# Altium PCB electronic tape measure.PcbDoc
Units mm, origin at the board's own origin, x right, y up, seen from the top; angles counter-clockwise.
Board outline 48 x 75 mm, 2 copper layers (Top Layer, Bottom Layer); 46 components, 43 nets, 170 pads, 128 vias.
Unrouted connection lines stored in the file: 143.
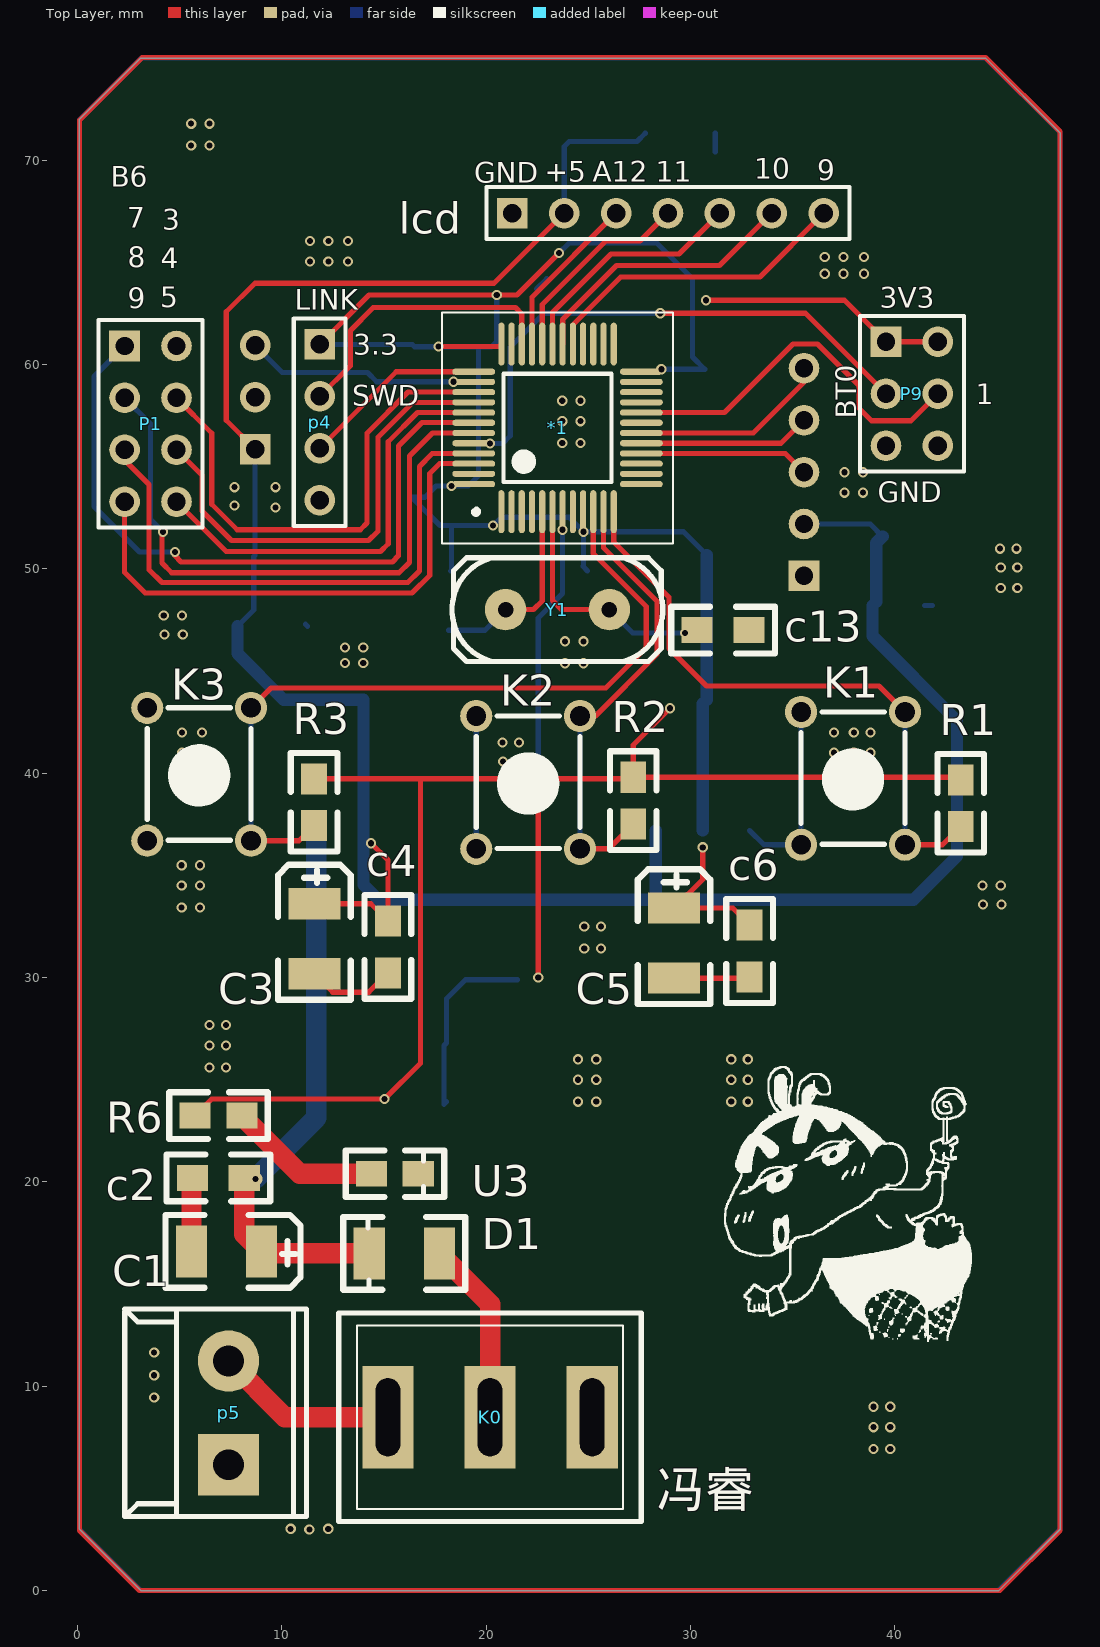
[diagram p0: Top Layer view]
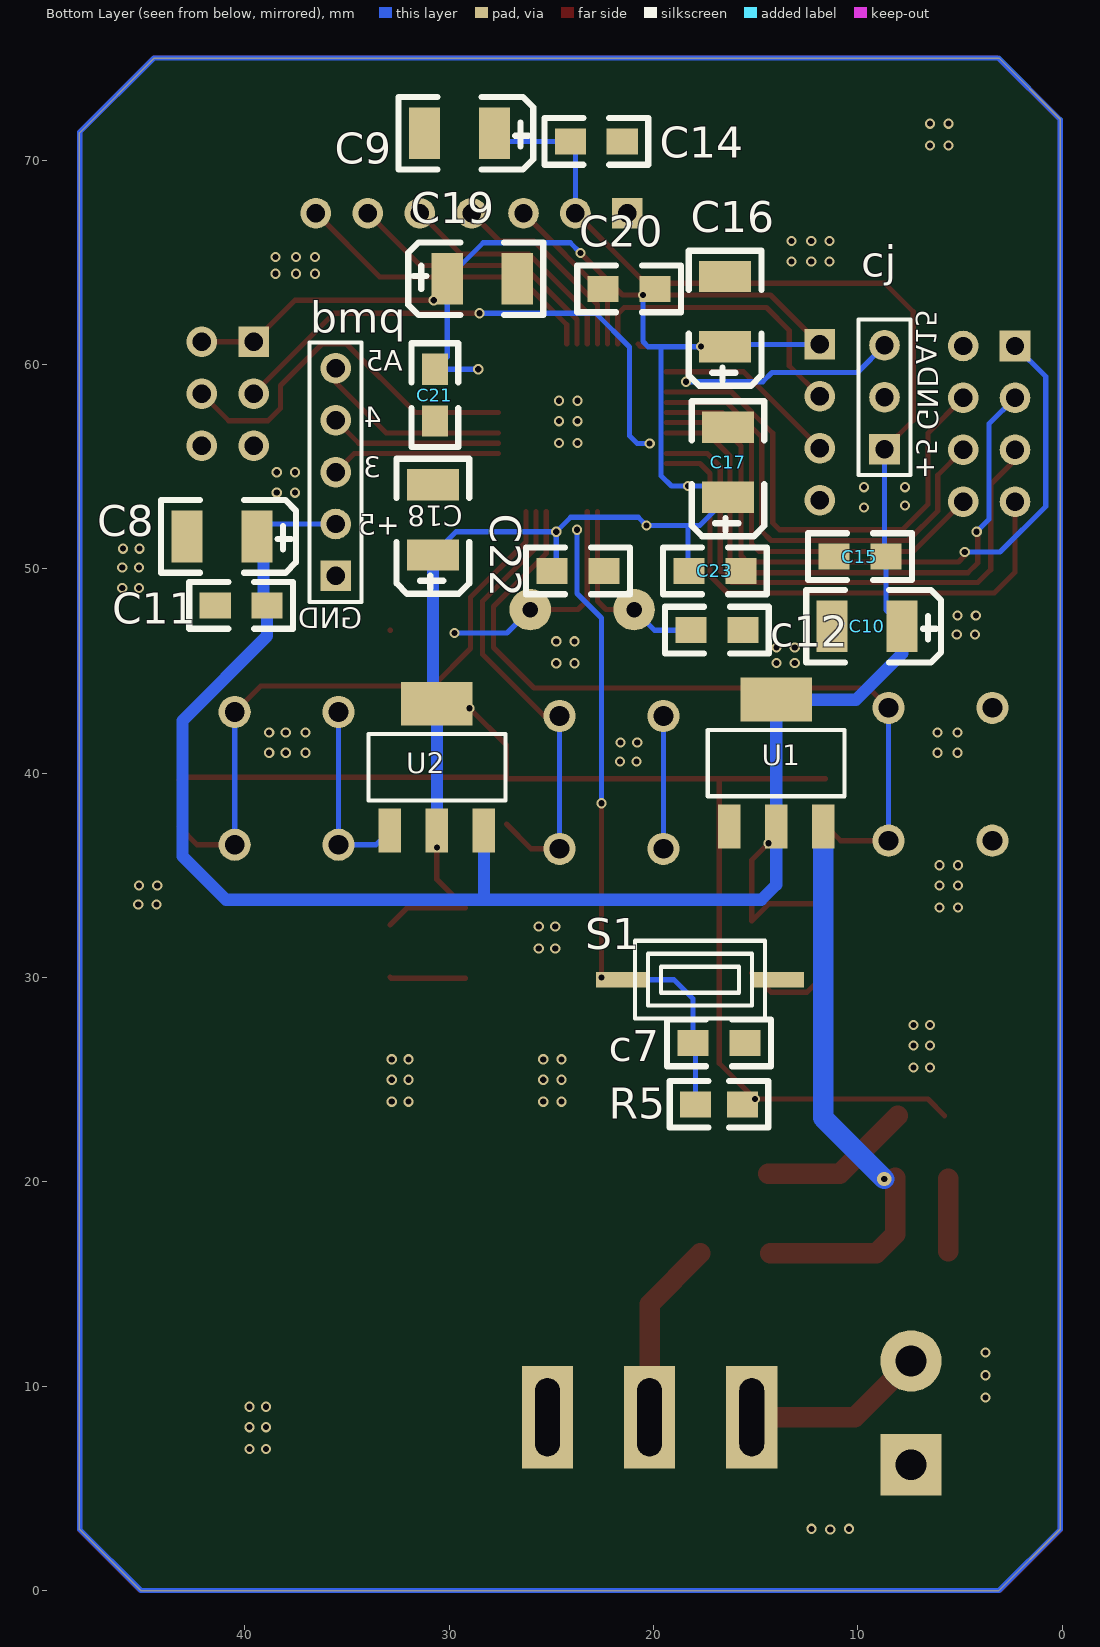
[diagram p1: Bottom Layer view, seen from below]
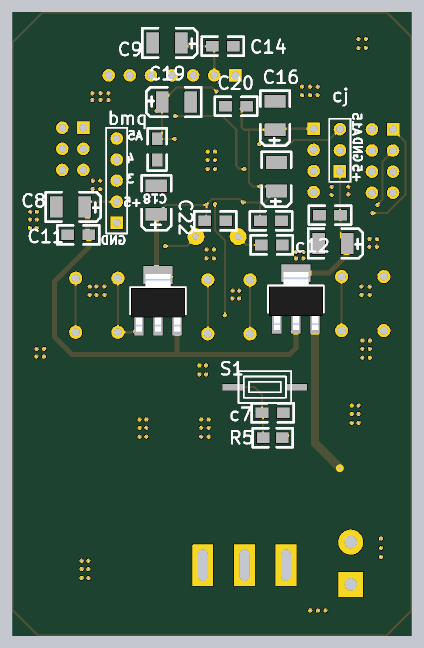
[diagram p2: 3D render of the assembled board from below, using the file's embedded part models]

## Layer stack, top to bottom
Top Solder: solder mask 0.0102, Solder Resist, Dk 3.5
Top Layer: signal copper 0.0356
Dielectric 1: dielectric 0.32, FR-4, Dk 4.8
Bottom Layer: signal copper 0.0356
Bottom Solder: solder mask 0.0102, Solder Resist, Dk 3.5

## Board outline
0.1,3 0.1,72 3.1,75 44.437,75 48.1,71.337 48.1,3 45.1,0 3.1,0

## Design rules (kind name [scope] priority, off if disabled: settings)
Clearance Clearance_1 [InPolygon] p1: gap=0.254 ignorepadtopadclearanceinfootprint=TRUE
Clearance [All] p2: gap=0 ignorepadtopadclearanceinfootprint=TRUE
PolygonConnect [All] p1: connectstyle=Relief reliefconductorwidth=0.254 reliefentries=4 polygonreliefangle="90 Angle" airgapwidth=0.254
RoutingCorners [All] p1: cornerstyle=45-Degree minsetback=0 maxsetback=2.54
RoutingVias [All] p1: holewidth=0.711 width=1.27 viastyle="Through Hole" minholewidth=0 minwidth=0.3 maxholewidth=2 maxwidth=1.27
SolderMaskExpansion [All] p1: expansion=0.102
Width [All] p1: maxlimit=5 minlimit=0.254 preferedwidth=0.254
29 further rules are at their usual default settings.

## Components (designator, comment, footprint, x,y, rotation, side; value= is the part's Value field where it differs from the comment)
*1 "STM32F103C8T6" STM32F103C8T6 23.5,56.9 r90 top
bmq "bianmaqi" HDR1X5 35.56,49.657 r90 bottom
C1 "10uf" 钽电容 7.3,16.6 r180 top
c2 "0.1uf" 0805电容 6.9,20.2 r0 top
C3 "10uf" 钽电容 11.6,31.9 r270 top
c4 "0.1uf" 0805电容 15.2,31.5 r90 top
C5 "10uf" 钽电容 29.2,31.685 r270 top
c6 "0.1uf" 0805电容 32.9,31.3 r90 top
c7 "0.1uf" 0805电容 16.8,26.8 r0 bottom
C8 "10uf" 钽电容 41.123,51.587 r0 bottom
C9 "10uf" 钽电容 29.504,71.319 r0 bottom
C10 "10uf" 钽电容 9.55,47.193 r0 bottom
C11 "100uf" 0805电容 40.183,48.209 r0 bottom
c12 "" 0805电容 16.9,47 r0 bottom value=18pF
c13 "" 0805电容 31.6,47 r180 top value=18pF
C14 "100uf" 0805电容 22.804,70.919 r180 bottom
C15 "100uf" 0805电容 9.9,50.6 r0 bottom
C16 "10uf" 钽电容 16.5,62.586 r90 bottom
C17 "10uf" 钽电容 16.358,55.22 r90 bottom
C18 "10uf" 钽电容 30.8,52.4 r90 bottom
C19 "10uf" 钽电容 28.386,64.2 r180 bottom
C20 "0.1uf" 0805电容 21.2,63.7 r0 bottom
C21 "100uf" 0805电容 30.7,58.5 r270 bottom
C22 "0.1uf" 0805电容 23.7,49.9 r180 bottom
C23 "100uf" 0805电容 17,49.9 r180 bottom
cj "ceju" HDR1X3 8.7,55.86 r90 bottom
D1 "二极管" 二极管 16,16.5 r180 top
K0 "贴片按键" 开关 20.197,8.484 r0 top
K1 "KEY_M" KEY_M 40.5,43 r270 top
K2 "KEY_M" KEY_M 24.6,42.8 r270 top
K3 "KEY_M" KEY_M 8.5,43.2 r270 top
lcd "lcd" HDR1X7 21.285,67.412 r0 top
P1 "Header 4X2" HDR2X4 2.311,60.909 r270 top
p4 "Header 4" HDR1X4 11.862,60.985 r270 top
p5 "Header 2" 接线端子2P 7.4,8.7 r90 top
P9 "Header 3X2" HDR2X3 39.573,61.112 r270 top
R1 "10k" 0805电阻 43.231,38.532 r270 top
R2 "10k" 0805电阻 27.203,38.659 r270 top
R3 "10k" 0805电阻 11.582,38.583 r270 top
R5 "10K" 0805电阻 16.8,23.8 r180 bottom
R6 "1k" 0805电阻 6.909,23.241 r0 top
S1 "" 贴片按键 17.729,29.896 r180 bottom
U1 "LM1117-5.0" LM117 14,40.5 r180 bottom
U2 "LM1117-3.3" LM117 30.6,40.3 r180 bottom
U3 "LED" LED 15.543,20.4 r0 top
Y1 "8MHz" 晶振 23.495,48.006 r90 top

## Footprints (in the part's own frame and the unit in brackets; to place one, negate y for a bottom-side part, rotate by r counter-clockwise, add the part's x,y. Pads: shape width x height; smd on the part's side, far side on the other; paste and mask are expansions set on the pad)
0805电容 [mil]
  rect 60x50 smd: 1(-50,0) 2(50,0)
  silkscreen extent -100,-45 100,45, body extent -39,-25 39,25, height 31
0805电阻 [mil]
  rect 60x50 smd: 1(-45,0) 2(45,0)
  silkscreen extent -95,-45 95,45
HDR1X3 [mm] "Connector; Header; 3 Position"
  rect 1.5x1.5 hole 0.9: 1(0,0)
  round 1.5 hole 0.9: 2(2.54,0) 3(5.08,0)
  silkscreen extent -1.27,-1.27 6.35,1.27
HDR1X4 [mm] "Connector; Header; 4 Position"
  rect 1.5x1.5 hole 0.9: 1(0,0)
  round 1.5 hole 0.9: 2(2.54,0) 3(5.08,0) 4(7.62,0)
  silkscreen extent -1.27,-1.27 8.89,1.27
HDR1X5 [mm] "Connector; Header; 5 Position"
  rect 1.5x1.5 hole 0.9: 1(0,0)
  round 1.5 hole 0.9: 2(2.54,0) 3(5.08,0) 4(7.62,0) 5(10.16,0)
  silkscreen extent -1.27,-1.27 11.43,1.27
HDR1X7 [mm] "Connector; Header; 7 Position"
  rect 1.5x1.5 hole 0.9: 1(0,0)
  round 1.5 hole 0.9: 2(2.54,0) 3(5.08,0) 4(7.62,0) 5(10.16,0) 6(12.7,0) 7(15.24,0)
  silkscreen extent -1.27,-1.27 16.51,1.27
HDR2X3 [mm] "Connector; Header; 3x2 Position"
  rect 1.5x1.5 hole 0.9: 1(0,0)
  round 1.5 hole 0.9: 2(0,2.54) 3(2.54,0) 4(2.54,2.54) 5(5.08,0) 6(5.08,2.54)
  silkscreen extent -1.27,-1.27 6.35,3.81
HDR2X4 [mm] "Connector; Header; 4x2 Position"
  rect 1.5x1.5 hole 0.9: 1(0,0)
  round 1.5 hole 0.9: 2(0,2.54) 3(2.54,0) 4(2.54,2.54) 5(5.08,0) 6(5.08,2.54) 7(7.62,0) 8(7.62,2.54)
  silkscreen extent -1.27,-1.27 8.89,3.81
KEY_M [mil]
  round 62 hole 38: 1(0,0) 1(255.91,0) 2(0,-200) 2(255.91,-200)
  silkscreen extent 0,-200 255,0
LED [mil]
  rect 60x50 smd: A(-45,0) K(45,0)
  silkscreen extent -95,-45 95,45
LM117 [mm]
  rect 1.1x2.15 smd: 1(-2.3,-3.1) 2(0,-3.1) 3(2.3,-3.1)
  rect 3.5x2.15 smd: 4(0,3.1)
  silkscreen extent -3.35,-1.63 3.35,1.63, body extent -3.22,-3.73 3.28,3.23, height 1.65
STM32F103C8T6 [mm]
  oval 2.1x0.3 smd: 1(-4.1,2.75) 2(-4.1,2.25) 3(-4.1,1.75) 4(-4.1,1.25) 5(-4.1,0.75) 6(-4.1,0.25) 7(-4.1,-0.25) 8(-4.1,-0.75) 9(-4.1,-1.25) 10(-4.1,-1.75) 11(-4.1,-2.25) 12(-4.1,-2.75) 25(4.1,-2.75) 26(4.1,-2.25) 27(4.1,-1.75) 28(4.1,-1.25) 29(4.1,-0.75) 30(4.1,-0.25) 31(4.1,0.25) 32(4.1,0.75) 33(4.1,1.25) 34(4.1,1.75) 35(4.1,2.25) 36(4.1,2.75)
  oval 0.3x2.1 smd: 13(-2.75,-4.1) 14(-2.25,-4.1) 15(-1.75,-4.1) 16(-1.25,-4.1) 17(-0.75,-4.1) 18(-0.25,-4.1) 19(0.25,-4.1) 20(0.75,-4.1) 21(1.25,-4.1) 22(1.75,-4.1) 23(2.25,-4.1) 24(2.75,-4.1) 37(2.75,4.1) 38(2.25,4.1) 39(1.75,4.1) 40(1.25,4.1) 41(0.75,4.1) 42(0.25,4.1) 43(-0.25,4.1) 44(-0.75,4.1) 45(-1.25,4.1) 46(-1.75,4.1) 47(-2.25,4.1) 48(-2.75,4.1)
  silkscreen extent -5.65,-5.65 5.65,5.65
二极管 [mil]
  rect 60x100 smd: A(-67.5,0) K(67.5,0)
  silkscreen extent -118,-70 118,70
开关 [mm]
  rect 2.5x5 hole 1.2 slot 3.81 at 90 deg: 1(-5,0) 2(0,0) 3(5,0)
  silkscreen extent -7.4,-5.1 7.4,5.1
接线端子2P [mm]
  rect 3x3 hole 1.5: 1(-2.54,0)
  round 3 hole 1.5: 2(2.54,0)
  silkscreen extent -5.08,-3.81 5.08,5.08, body extent -5.71,-3.51 4.89,4.09, height 10
晶振 [mil]
  round 80 hole 30: 1(0,100) 2(0,-100)
  silkscreen extent -100,-203 100,203
贴片按键 [mil]
  rect 100x30 smd: 1(-150,0) 2(150,0)
  silkscreen extent -125,-75 125,75
钽电容 [mil]
  rect 60x100 smd: A(-67.5,0) K(67.5,0)
  silkscreen extent -142,-70 118,70

## Part data
bmq: library part "Header 5", "Header, 5-Pin", LatestRevisionDate=17-Jul-2002, LatestRevisionNote="Re-released for DXP Platform.", Publisher="Altium Limited"
C1 C3 C5 C8 C9 C10 C16 C17 C18 C19: library part 极性电容
c2 c4 c6 c7 C11 C14 C15 C20 C21 C22 C23: library part 电容
c12 c13: library part "Cap Semi", "Capacitor (Semiconductor SIM Model)", LatestRevisionDate=29-May-2009, LatestRevisionNote="IPC-7351 Footprint Added.", PackageDescription="Chip Capacitor", PackageReference=C1206, Published=8-Jun-2000, Publisher="Altium Limited"
cj: library part "Header 3", "Header, 3-Pin", LatestRevisionDate=17-Jul-2002, LatestRevisionNote="Re-released for DXP Platform.", Publisher="Altium Limited"
lcd: library part "Header 7", "Header, 7-Pin", LatestRevisionDate=17-Jul-2002, LatestRevisionNote="Re-released for DXP Platform.", Publisher="Altium Limited"
P1: "Header, 4-Pin, Dual row", LatestRevisionDate=17-Jul-2002, LatestRevisionNote="Re-released for DXP Platform.", Publisher="Altium Limited"
p4: "Header, 4-Pin", LatestRevisionDate=17-Jul-2002, LatestRevisionNote="Re-released for DXP Platform.", Publisher="Altium Limited"
p5: "Header, 2-Pin", LatestRevisionDate=17-Jul-2002, LatestRevisionNote="Re-released for DXP Platform.", Publisher="Altium Limited"
P9: "Header, 3-Pin, Dual row", LatestRevisionDate=17-Jul-2002, LatestRevisionNote="Re-released for DXP Platform.", Publisher="Altium Limited"
R1 R2 R3 R6: library part 电阻
R5: library part Res2, "Resistor", LatestRevisionDate=17-Jul-2002, LatestRevisionNote="Re-released for DXP Platform.", PackageDescription="Axial Device, Thru-Hole; 2 Leads; 0.4 in Pin Spacing", PackageReference=AXIAL-0.4, Published=8-Jun-2000, Publisher="Altium Limited"
S1: library part SW-PB, "Switch", LatestRevisionDate=17-Jul-2002, LatestRevisionNote="Re-released for DXP Platform.", PackageDescription="Switch; 2 Leads", PackageReference=SPST-2, Published=24-Mar-1999, Publisher="Altium Limited"
U1 U2: library part LM117
Y1: library part XTAL, "Crystal Oscillator", LatestRevisionDate=17-Jul-2002, LatestRevisionNote="Re-released for DXP Platform.", PackageDescription="Crystal, Thru-Hole; 2 Leads; Body 3.1 x 8.2 mm (Dia.xH)", PackageReference=R38, Published=8-Jun-2000, Publisher="Altium Limited"

## Via types
v1: diameter 0.5, hole 0.3, Top Layer to Bottom Layer, 127 vias
v2: diameter 0.7, hole 0.3, Top Layer to Bottom Layer, 1 vias

## Nets (pads, with @x,y where several pads share a name; then routed paths per layer and width w, separated by ;. In a path a pad name is that pad's centre, name@x,y a point inside that pad or via, vN(x,y) a via of type N, cw(c..) or ccw(c..) an arc to the next point about the centre after c; other vN are vias at no path point)
3.3V: *1.9 *1.24 *1.36 *1.48 C5.A c6.2 C16.A C17.A C18.A C19.A C20.1 C21.1 C22.1 C23.1 p4.1 P9.1 P9.2 R1.1 R2.1 R3.1 R5.2 R6.1 U2.2 U2.4 | length 167.7
  Top Layer w0.254: R6.1 6.579,24.054 v1(15.037,24.054) 16.789,25.806 16.789,39.726 ; R3.1 16.789,39.726 ; p4.1 14.275,63.398 v1(20.523,63.398) 21.514,63.398 v1(23.571,65.456) ; v1(17.678,60.884) 20.634,60.884 *1.36 ; v1(29.007,43.18) 27.203,41.377 R2.1 ; v1(30.607,36.373) 30.607,34.807 C5.A 32.07,33.4 c6.2 ; v1(30.759,63.144) 37.541,63.144 P9.1 P9.2 ; R1.1 43.104,39.802 R2.1 ; 16.789,39.726 27.127,39.726 R2.1
  Bottom Layer w0.254: p4.1@11.976,60.871 p4.1 16.386,60.985 C16.A 19.634,60.871 ; C23.1 18.313,49.943 18.313,52.121 ; v1(20.523,63.398) 20.523,61.123 20.271,60.871 19.634,60.871 ; v1(23.571,65.456) 24.079,65.964 28.336,65.964 C19.A 30.1,60.37 C21.1 v1(28.579,59.77) ; C22.1 24.74,50.13 24.765,50.156 v1(24.765,51.816) ; C18.A 29.669,51.816 v1(24.765,51.816) ; 18.313,52.121 v1(20.345,52.121) 20.752,52.527 24.054,52.527 v1(24.765,51.816) ; 18.313,52.121 17.742,52.121 C17.A 17.005,53.505 17.551,54.051 v1(18.313,54.051) 19.126,54.051 19.634,54.559 19.634,60.871
  Bottom Layer w0.6: U2.2 U2.4 30.8,43.6 C18.A
+5: bmq.2 C3.A c4.2 C8.A C9.A C10.A C11.1 C14.1 C15.1 cj.1 lcd.2 U1.2 U1.4 U2.3 | length 123.2
  Top Layer w0.254: cj.1 7.29,57.27 7.29,62.586 8.687,63.983 20.396,63.983 lcd.2 ; C3.A 14.356,33.614 c4.2 15.2,35.752 v1(14.376,36.576)
  Bottom Layer w0.254: C10.A 8.63,47.987 C15.1 8.7,50.67 cj.1 ; lcd.2@23.824,67.419 23.824,70.669 C14.1 27.389,70.919 C9.A ; bmq.2 38.798,52.197 C8.A ; C11.1 C11.1@39.091,48.387
  Bottom Layer w0.6: C10.A 7.836,45.86 10.096,43.6 U1.4 U1.2 14,34.539 14.732,33.807 28.3,33.807 ; U2.3 28.3,33.807 ; C11.1 38.913,46.711 43.053,42.57 43.053,35.941 40.919,33.807 28.3,33.807 ; C11.1@39.091,48.387 39.091,51.27 C8.A
BOOT0: *1.44 P9.3 | length 26.2
  Top Layer w0.254: v1(28.524,62.509) 35.636,62.509 P9.3
  Bottom Layer w0.254: v1(20.193,56.134) 20.803,56.134 21.184,56.515 21.184,60.858 22.835,62.509 v1(28.524,62.509)
BOOT1: *1.20 P9.4 | length 18.7
  Top Layer w0.254: *1.20 31.666,57.65 35.027,61.011 36.22,61.011 38.252,58.979 38.252,57.861 38.862,57.252 40.792,57.252 P9.4
GND: *1.8 *1.23 *1.35 *1.47 bmq.1 C1.K c2.1 C3.K c4.1 C5.K c6.1 c7.1 C8.K C9.K C10.K C11.2 c12.1 c13.1 C14.2 C15.2 C16.K C17.K C18.K C19.K C20.2 C21.2 C22.2 C23.2 cj.2 K1.2 K2.2 K3.2 lcd.1 p4.4 p5.1 P9.5 P9.6 S1.2 U1.1 U2.1 U3.K | length 30.1
  Top Layer w0.254: c2.1@5.585,20.155 c2.1 ; C3.K 12.499,29.286 14.256,29.286 c4.1 ; C5.K 32.841,29.971 c6.1 ; c13.1 c13.1@32.903,47
  Top Layer w1: C1.K c2.1@5.585,20.155
  Bottom Layer w0.254: C10.K@11.17,47.288 C10.K ; K2.2@19.52,36.3 K2.2@19.52,42.8 ; lcd.1@21.284,67.419 lcd.1@21.534,67.669 ; C20.2 C20.2@22.97,64.2 ; C9.K@31.218,70.41 C9.K ; U2.1 33.6,36.5 35.42,36.5 K1.2@35.42,43 ; bmq.1@35.527,49.657 bmq.1 ; C11.2 C11.2@41.834,48.209
  other v1: 11.354,2.997 10.439,3.023 12.277,3.023 38.968,6.927 39.781,6.927 38.968,8 39.781,8 38.968,9 39.781,9 3.759,9.449 3.759,10.541 3.759,11.659 24.5,23.927 25.397,23.927 32,23.927 32.813,23.927 24.5,25 25.397,25 32,25 32.813,25 6.468,25.6 7.281,25.6 24.5,26 25.397,26 32,26 32.813,26 6.468,26.673 7.281,26.673 6.468,27.673 7.281,27.673 24.809,31.427 25.622,31.427 24.809,32.5 25.622,32.5 5.106,33.427 6.003,33.427 44.325,33.573 45.222,33.573 5.106,34.5 6.003,34.5 44.29,34.5 45.187,34.5 5.106,35.5 6.003,35.5 20.837,40.573 21.65,40.573 5.127,41 6.108,41 37.032,41 38,41 38.813,41 20.803,41.5 21.615,41.5 5.127,42 6.108,42 37.032,42 38,42 38.813,42 23.868,45.381 24.765,45.381 13.094,45.393 13.991,45.393 13.094,46.152 13.991,46.152 23.868,46.454 24.765,46.454 4.265,46.787 5.162,46.787 4.23,47.714 5.127,47.714 45.187,49.063 46,49.063 45.187,50.063 46,50.063 45.153,50.99 45.965,50.99 9.704,53 7.696,53.098 37.546,53.73 38.443,53.73 7.696,54 9.704,54 37.546,54.73 38.443,54.73 23.73,56.157 24.627,56.157 23.73,57.23 24.627,57.23 23.73,58.23 24.627,58.23 36.573,64.446 37.5,64.446 38.5,64.446 11.386,65.04 12.283,65.04 13.251,65.04 36.573,65.259 37.5,65.259 38.5,65.259 11.386,66.04 12.283,66.04 13.251,66.04 5.571,70.714 6.468,70.714 5.571,71.787 6.468,71.787
NetC1_A: C1.A c2.2 D1.K U1.3 | length 27.8
  Top Layer w1: c2.2 8.17,17.444 C1.A 9.114,16.5 D1.K
  Bottom Layer w1: v2(8.712,20.142) 11.7,23.13 U1.3
NetD1_A: D1.A K0.2 | length 9
  Top Layer w1: D1.A 20.197,14.018 K0.2
NetK0_1: K0.1 p5.2 | length 8.9
  Top Layer w1: p5.2 10.156,8.484 K0.1
NetR6_2: R6.2 U3.A | length 7.5
  Top Layer w1: R6.2 10.893,20.4 U3.A
PA0: *1.10 K3.1 R3.2 | length 38.2
  Top Layer w0.254: K3.1@8.5,36.7 10.843,36.7 R3.2 ; K3.1@8.5,43.2 9.471,44.171 25.857,44.171 27.838,46.152 27.838,48.158 25.25,50.747 *1.10
  Bottom Layer w0.254: K3.1@8.5,36.7 K3.1@8.5,43.2
PA1: *1.11 K2.1 R2.2 | length 22.7
  Top Layer w0.254: K2.1@24.6,36.3 25.988,36.3 R2.2 ; K2.1@24.6,42.8 25.35,42.8 28.372,45.822 28.372,48.412 25.75,51.034 *1.11
  Bottom Layer w0.254: K2.1@24.6,36.3 K2.1@24.6,42.8
PA2: *1.12 K1.1 R1.2 | length 30.2
  Top Layer w0.254: *1.12 26.25,51.322 28.956,48.616 28.956,46.101 30.785,44.272 39.228,44.272 K1.1@40.5,43 ; K1.1@40.5,36.5 42.342,36.5 R1.2
  Bottom Layer w0.254: K1.1@40.5,36.5 K1.1@40.5,43
PA3: *1.13
PA4: *1.14
PA5: *1.15
PA6: *1.16 bmq.3 | length 8.3
  Top Layer w0.254: *1.16 34.647,55.65 bmq.3
PA7: *1.17 bmq.4 | length 8.4
  Top Layer w0.254: *1.17 34.433,56.15 bmq.4
PA8: *1.29 lcd.7 | length 15.5
  Top Layer w0.254: *1.29 24.25,61.944 26.594,64.287 33.401,64.287 lcd.7
PA9: *1.30 lcd.6 | length 13.6
  Top Layer w0.254: *1.30 23.75,62.206 26.391,64.846 31.42,64.846 lcd.6
PA10: *1.31 lcd.5 | length 11.8
  Top Layer w0.254: *1.31 23.25,62.544 26.111,65.405 29.439,65.405 lcd.5
PA11: *1.32 lcd.4 | length 9.9
  Top Layer w0.254: *1.32 22.75,62.933 25.857,66.04 27.534,66.04 lcd.4
PA12: *1.33 lcd.3 | length 8.1
  Top Layer w0.254: *1.33 22.25,63.296 lcd.3
PA15: *1.38 cj.3 | length 10.5
  Bottom Layer w0.254: cj.3 10.026,59.614 14.199,59.614 14.656,59.157 v1(18.415,59.157)
PB0: *1.18 bmq.5 | length 9.7
  Top Layer w0.254: *1.18 33.079,56.65 35.56,59.131 bmq.5
PB1: *1.19
PB3: *1.39 P1.4 | length 24.6
  Top Layer w0.254: P1.4 6.579,56.642 6.579,53.162 7.823,51.918 13.843,51.918 14.173,52.248 14.173,56.642 16.181,58.65 *1.39
PB4: *1.40 P1.6 | length 22.9
  Top Layer w0.254: P1.6 6.096,54.585 6.096,52.832 7.544,51.384 14.249,51.384 14.707,51.841 14.707,56.439 16.418,58.15 *1.40
PB5: *1.41 P1.8 | length 21.3
  Top Layer w0.254: P1.8 7.29,50.851 14.834,50.851 15.215,51.232 15.215,56.225 16.64,57.65 *1.41
PB6: *1.42 P1.1 | length 34.3
  Top Layer w0.254: v1(4.775,50.825) 4.775,50.648 5.08,50.343 15.418,50.343 15.723,50.648 15.723,56.014 16.866,57.158 *1.42@19.4,57.158
  Bottom Layer w0.254: P1.1 0.813,59.411 0.813,53.061 3.048,50.825 v1(4.775,50.825)
PB7: *1.43 P1.3 | length 30.2
  Top Layer w0.254: v1(4.191,51.816) 4.14,51.765 4.14,50.292 4.623,49.809 15.748,49.809 16.256,50.317 16.256,55.523 17.383,56.65 *1.43
  Bottom Layer w0.254: P1.3 3.581,57.099 3.581,52.426 v1(4.191,51.816)
PB8: *1.45 P1.5 | length 28.1
  Top Layer w0.254: P1.5 2.311,55.321 3.505,54.127 3.505,49.962 4.14,49.327 16.173,49.327 16.739,49.893 16.739,55.016 17.372,55.65 *1.45
PB9: *1.46 P1.7 | length 26.5
  Top Layer w0.254: P1.7 2.311,49.835 3.327,48.819 16.383,48.819 17.247,49.682 17.247,54.661 17.736,55.15 *1.46
PB10: *1.21
PB11: *1.22
PB12: *1.25
PB13: *1.26
PB14: *1.27
PB15: *1.28
RESET: *1.7 c7.2 R5.1 S1.1 | length 31.7
  Top Layer w0.254: v1(22.555,29.997) v1(22.555,38.532)
  Bottom Layer w0.254: R5.1@18.07,23.927 R5.1 17.943,26.673 c7.2 18.07,28.967 18.999,29.896 S1.1 ; v1(22.555,38.532) 22.555,47.6 23.749,48.793 v1(23.749,51.918)
SWC: *1.37 p4.3 | length 9.1
  Top Layer w0.254: p4.3 15.606,59.65 *1.37
SWD: *1.34 p4.2 | length 14.3
  Top Layer w0.254: p4.2 13.36,59.944 13.36,61.671 14.478,62.789 21.438,62.789 21.75,62.476 *1.34
XTAL1: *1.5 c12.2 Y1.1 | length 9.5
  Top Layer w0.254: Y1.1 22.327,48.006 22.75,48.429 *1.5
  Bottom Layer w0.254: c12.2 19.949,47 Y1.1
XTAL2: *1.6 c13.2 Y1.2 | length 11.5
  Top Layer w0.254: *1.6 23.25,48.454 23.698,48.006 Y1.2
  Bottom Layer w0.254: Y1.2 27.178,46.863 v1(29.743,46.863)
pads on no net: *1.1 *1.2 *1.3 *1.4 K0.3 P1.2
copper on no net: | length 477.2
  Top Layer w0.254: 0.102,2.946 3.048,0 45.136,0 48.082,2.946 48.082,71.399 44.45,75.032 3.175,75.032 0.102,71.958 0.102,2.946
  Bottom Layer w0.254: 0.102,2.997 3.099,0 45.085,0 48.082,2.997 48.082,71.374 44.45,75.006 3.124,75.006 0.102,71.984 0.102,2.997

## Polygon pours and split planes (outlines as drawn)
no net on Top Overlay "lala" (solid, remove dead copper): -5.055,76.53
GND on Bottom Layer "lala" (solid, remove dead copper, pour order 0): 92.841,78.135 93.146,77.83 93.146,-1.901 168.253,-1.901 153.318,13.034 153.318,80.903
GND on Top Layer "lala" (solid, remove dead copper, pour order 6): 97.319,80.775 91.376,74.831 91.376,-5.433 162.216,-5.433 158.711,-1.927 158.711,82.401

## Silkscreen, mask and mechanical layers (free items; w line width, h text height)
Top Overlay:
  drawing of 3445 lines, arcs and shapes, not listed
  text "10" at 33.122,69.088 h1
  text "9" at 36.22,69.012 h1
  text "+5" at 22.885,68.936 h1
  text "A12" at 25.222,68.936 h1
  text "11" at 28.296,68.936 h1
  text "GND" at 19.431,68.885 h1
  text "B6" at 1.626,68.707 h1
  text "7" at 2.438,66.7 h1
  text "3" at 4.166,66.599 h1
  text "8" at 2.464,64.77 h1
  text "4" at 4.089,64.719 h1
  text "5" at 4.064,62.814 h1
  text "9" at 2.464,62.763 h1
  text "LINK" at 10.643,62.687 h1
  text "3.3" at 13.513,60.477 h1
  text "1" at 43.967,58.064 h1
  text "SWD" at 13.462,57.988 h1
  text "BT0" at 38.125,57.353 h1 r90
  text "冯睿" at 28.321,3.505 h3
Bottom Overlay:
  text "A15" at 7.137,60.02 h1 r90
  text "A5" at 32.283,59.69 h1
  text "4" at 33.299,56.921 h1
  text "GND" at 7.061,56.794 h1 r90
  text "3" at 33.325,54.483 h1
  text "+5" at 7.112,54.381 h1 r90
  text "+5" at 32.41,51.668 h1
  text "GND" at 34.265,47.092 h1
Mechanical 1:
  the board outline again, w0.254

## Text inside footprints (layer, text, board x,y; h text height)
P9: Top Overlay "GND" at 39.173,53.272 h1; Top Overlay "3V3" at 39.273,62.772 h1